# Altium PCB T3168.PcbDoc
Units mil, origin at the board's own origin, x right, y up, seen from the top; angles counter-clockwise.
Board outline 4005.03 x 3985.03 mil, 2 copper layers (Top Layer, Bottom Layer); 22 components, 15 nets, 90 pads, 0 vias.
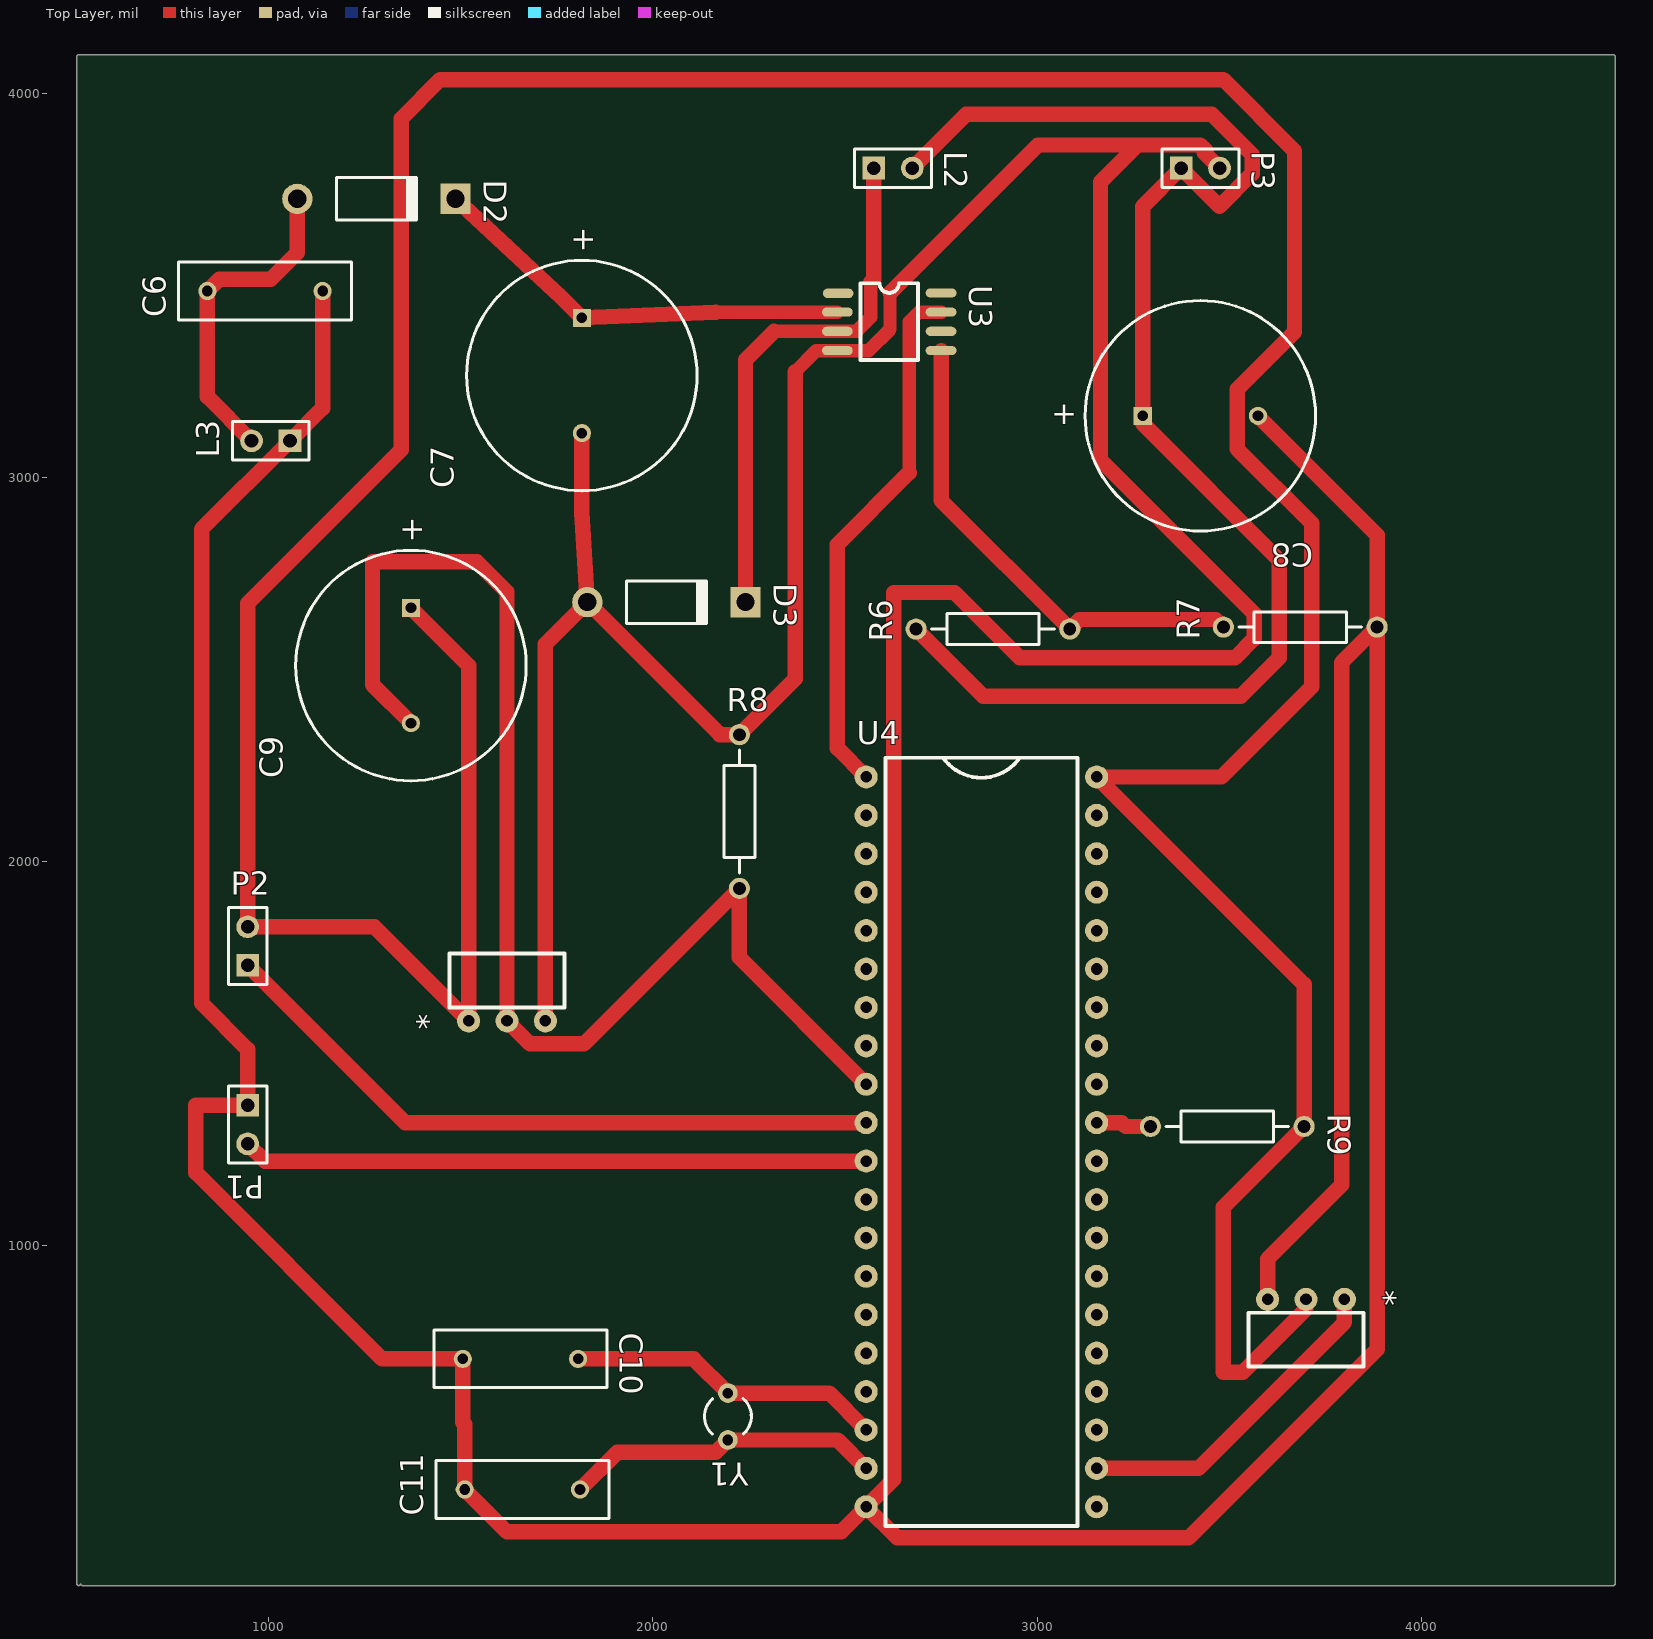
[diagram p0: Top Layer view]
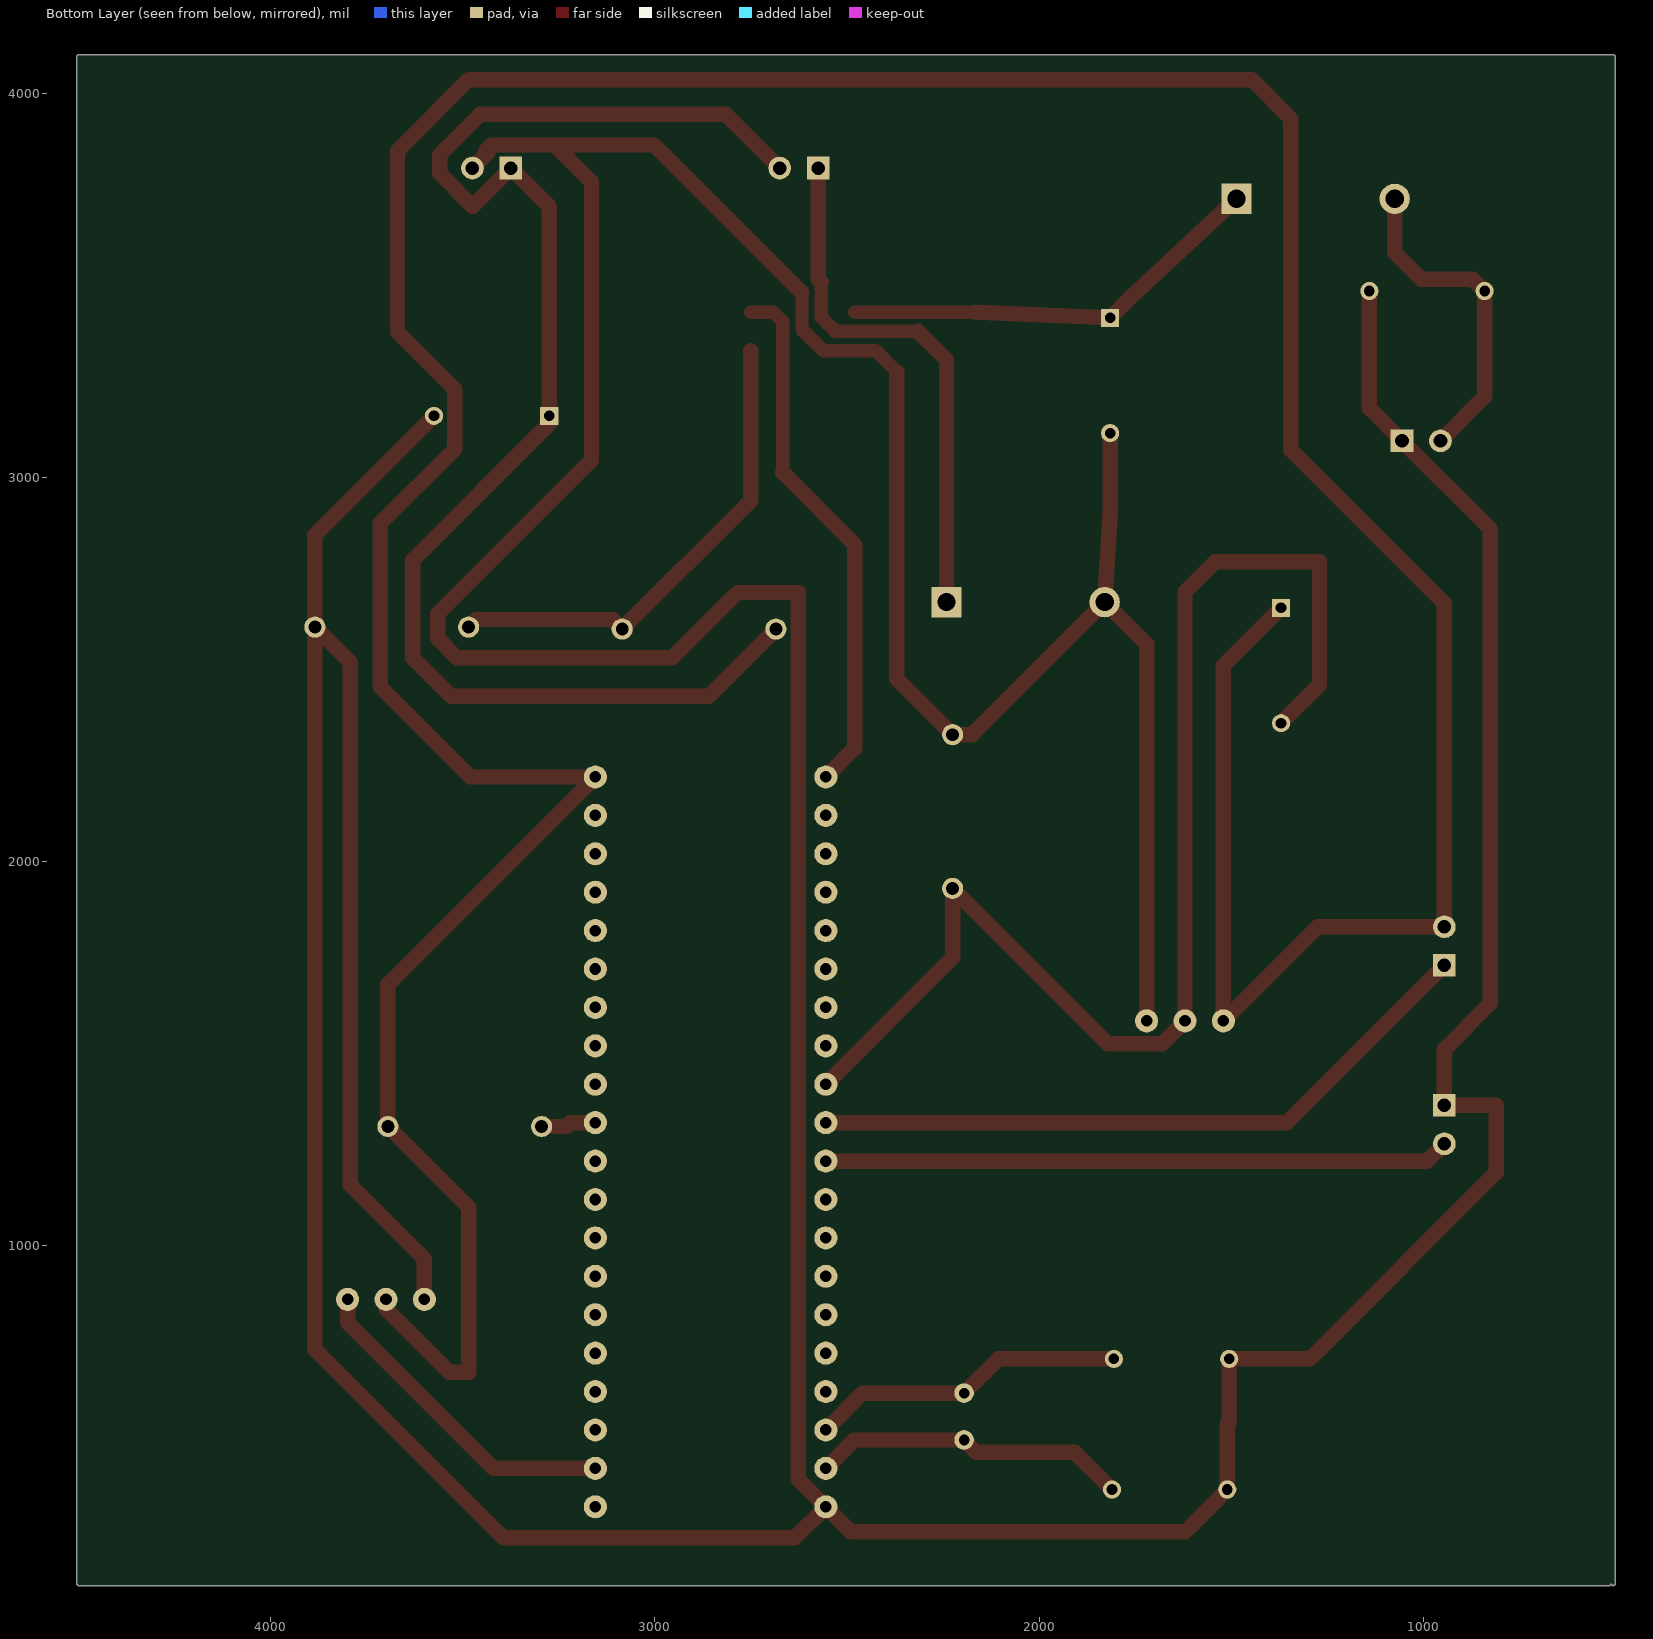
[diagram p1: Bottom Layer view, seen from below]

## Layer stack, top to bottom
Top Solder: solder mask 0.4, Solder Resist, Dk 3.5
Top Layer: signal copper 1.4
Dielectric 1: dielectric 12.6, FR-4, Dk 4.8
Bottom Layer: signal copper 1.4
Bottom Solder: solder mask 0.4, Solder Resist, Dk 3.5

## Board outline
499.98,120 499.98,4095 cw(c505,4095) 505,4100.02 4500,4100.02 cw(c4500,4095) 4505.02,4095 4505.02,120 cw(c4500,120) 4500,114.98 515,114.98 cw(c515,120) 510,119.61 cw(c505,120)

## Design rules (kind name [scope] priority, off if disabled: settings)
Clearance "Schematic Clearance Constraint_39" [HasPad('U4-1')] p1: gap=10
Clearance "Schematic Clearance Constraint_38" [HasPad('U4-2')] p2: gap=10
Clearance "Schematic Clearance Constraint_37" [HasPad('U4-3')] p3: gap=10
Clearance "Schematic Clearance Constraint_36" [HasPad('U4-4')] p4: gap=10
Clearance "Schematic Clearance Constraint_35" [HasPad('U4-5')] p5: gap=10
Clearance "Schematic Clearance Constraint_34" [HasPad('U4-6')] p6: gap=10
Clearance "Schematic Clearance Constraint_33" [HasPad('U4-7')] p7: gap=10
Clearance "Schematic Clearance Constraint_32" [HasPad('U4-8')] p8: gap=10
Clearance "Schematic Clearance Constraint_31" [HasPad('U4-9')] p9: gap=10
Clearance "Schematic Clearance Constraint_30" [HasPad('U4-10')] p10: gap=10
Clearance "Schematic Clearance Constraint_29" [HasPad('U4-11')] p11: gap=10
Clearance "Schematic Clearance Constraint_28" [HasPad('U4-12')] p12: gap=10
Clearance "Schematic Clearance Constraint_27" [HasPad('U4-13')] p13: gap=10
Clearance "Schematic Clearance Constraint_26" [HasPad('U4-14')] p14: gap=10
Clearance "Schematic Clearance Constraint_25" [HasPad('U4-15')] p15: gap=10
Clearance "Schematic Clearance Constraint_24" [HasPad('U4-16')] p16: gap=10
Clearance "Schematic Clearance Constraint_23" [HasPad('U4-17')] p17: gap=10
Clearance "Schematic Clearance Constraint_22" [HasPad('U4-18')] p18: gap=10
Clearance "Schematic Clearance Constraint_21" [HasPad('U4-19')] p19: gap=10
Clearance "Schematic Clearance Constraint_20" [HasPad('U4-20')] p20: gap=10
Clearance "Schematic Clearance Constraint_19" [HasPad('U4-21')] p21: gap=10
Clearance "Schematic Clearance Constraint_18" [HasPad('U4-22')] p22: gap=10
Clearance "Schematic Clearance Constraint_17" [HasPad('U4-23')] p23: gap=10
Clearance "Schematic Clearance Constraint_16" [HasPad('U4-24')] p24: gap=10
Clearance "Schematic Clearance Constraint_15" [HasPad('U4-25')] p25: gap=10
Clearance "Schematic Clearance Constraint_14" [HasPad('U4-26')] p26: gap=10
Clearance "Schematic Clearance Constraint_13" [HasPad('U4-27')] p27: gap=10
Clearance "Schematic Clearance Constraint_12" [HasPad('U4-28')] p28: gap=10
Clearance "Schematic Clearance Constraint_11" [HasPad('U4-29')] p29: gap=10
Clearance "Schematic Clearance Constraint_10" [HasPad('U4-30')] p30: gap=10
Clearance "Schematic Clearance Constraint_9" [HasPad('U4-31')] p31: gap=10
Clearance "Schematic Clearance Constraint_8" [HasPad('U4-32')] p32: gap=10
Clearance "Schematic Clearance Constraint_7" [HasPad('U4-33')] p33: gap=10
Clearance "Schematic Clearance Constraint_6" [HasPad('U4-34')] p34: gap=10
Clearance "Schematic Clearance Constraint_5" [HasPad('U4-35')] p35: gap=10
Clearance "Schematic Clearance Constraint_4" [HasPad('U4-36')] p36: gap=10
Clearance "Schematic Clearance Constraint_3" [HasPad('U4-37')] p37: gap=10
Clearance "Schematic Clearance Constraint_2" [HasPad('U4-38')] p38: gap=10
Clearance "Schematic Clearance Constraint_1" [HasPad('U4-39')] p39: gap=10
Clearance "Schematic Clearance Constraint" [HasPad('U4-40')] p40: gap=10
Clearance [All] p41: gap=10
PolygonConnect [All] p1: connectstyle=Relief reliefconductorwidth=10 reliefentries=4 polygonreliefangle="90 Angle" airgapwidth=10
RoutingLayers [All] p1: top layer_v5=TRUE bottom layer_v5=FALSE
RoutingVias [All] p1: holewidth=28 width=40 viastyle="Through Hole" minholewidth=10 minwidth=20 maxholewidth=50 maxwidth=70
SolderMaskExpansion [All] p1: expansion=4
Width [All] p1: maxlimit=50 minlimit=10 preferedwidth=40
29 further rules are at their usual default settings.

## Components (designator, comment, footprint, x,y, rotation, side; value= is the part's Value field where it differs from the comment)
* "SWITCH" SWITCH 1620,1685 r90 top
* "SWITCH" SWITCH 3700,760 r270 top
C6 "Cap" RAD-0.3 990,3485 r180 top
C7 "Cap Pol1" RB7.6-15 1815,3265 r90 top
C8 "Cap Pol1" RB7.6-15 3425,3160 r180 top
C9 "Cap Pol1" RB7.6-15 1370,2510 r90 top
C10 "Cap" RAD-0.3 1655,705 r0 top
C11 "Cap" RAD-0.3 1660,365 r180 top
D2 "1N5817" DO-41 1280,3725 r0 top
D3 "1N5817" DO-41 2035,2675 r0 top
L2 "10uF/CD54" HDR1X2 2575,3805 r0 top
L3 "1" HDR1X2 1055,3095 r180 top
P1 "Header 2" HDR1X2 945,1365 r270 top
P2 "Header 2" HDR1X2 945,1730 r90 top
P3 "Header 2" HDR1X2 3375,3805 r0 top
R6 "Res2" AXIAL-0.4 2885,2605 r180 top
R7 "Res2" AXIAL-0.4 3685,2610 r180 top
R8 "Res2" AXIAL-0.4 2225,2130 r90 top
R9 "Res2" AXIAL-0.4 3495,1310 r0 top
U3 "T3168" "XKT-801 - duplicate1" 2367,3459 r0 top
U4 "STC89C52RC" STC89C52RC 760,3105 r0 top
Y1 "12MHZ" R38 2195,555 r180 top

## Footprints (in the part's own frame and the unit in brackets; to place one, negate y for a bottom-side part, rotate by r counter-clockwise, add the part's x,y. Pads: shape width x height; smd on the part's side, far side on the other; paste and mask are expansions set on the pad)
AXIAL-0.4 [mm] "Axial Device, Thru-Hole; 2 Leads; 0.4 in Pin Spacing"
  round 1.4 hole 0.85: 1(-5.08,0) 2(5.08,0)
  silkscreen extent -4.06,-1.02 4.06,1.02
DO-41 [mm] "Diode, Axial; Body 5.2 x 2.7 mm (LxDia. max), Lead Dia. 0.86 mm (max)"
  round 2 hole 1.2: 1(-5.23,0)
  rect 2x2 hole 1.2: 2(5.23,0)
  silkscreen extent -2.65,-1.4 2.75,1.4
HDR1X2 [mm] "Connector; Header; 2 Position"
  rect 1.5x1.5 hole 0.9: 1(0,0)
  round 1.5 hole 0.9: 2(2.54,0)
  silkscreen extent -1.27,-1.27 3.81,1.27
R38 [mm] "Crystal, Thru-Hole; 2 Leads; Body 3.1 x 8.2 mm (Dia.xH)"
  round 1.3 hole 0.7: 1(0,1.55) 2(0,-1.55)
  silkscreen extent -1.55,-1.19 1.55,1.17
RAD-0.3 [mm] "Radial Cap, Thru-Hole; 2 Leads; 0.3 in Pin Spacing"
  round 1.2 hole 0.7: 1(-3.81,0) 2(3.81,0)
  silkscreen extent -5.71,-1.91 5.71,1.91
RB7.6-15 [mm] "Polarized Capacitor (Radial); 2 Leads"
  rect 1.2x1.2 hole 0.7: 1(3.81,0)
  round 1.2 hole 0.7: 2(-3.81,0)
  silkscreen extent -7.62,-7.62 7.62,7.62
STC89C52RC [mil]
  round 60 hole 30: 1(1795,-885) 2(1795,-985) 3(1795,-1085) 4(1795,-1185) 5(1795,-1285) 6(1795,-1385) 7(1795,-1485) 8(1795,-1585) 9(1795,-1685) 10(1795,-1785) 11(1795,-1885) 12(1795,-1985) 13(1795,-2085) 14(1795,-2185) 15(1795,-2285) 16(1795,-2385) 17(1795,-2485) 18(1795,-2585) 19(1795,-2685) 20(1795,-2785) 21(2395,-2785) 22(2395,-2685) 23(2395,-2585) 24(2395,-2485) 25(2395,-2385) 26(2395,-2285) 27(2395,-2185) 28(2395,-2085) 29(2395,-1985) 30(2395,-1885) 31(2395,-1785) 32(2395,-1685) 33(2395,-1585) 34(2395,-1485) 35(2395,-1385) 36(2395,-1285) 37(2395,-1185) 38(2395,-1085) 39(2395,-985) 40(2395,-885)
  silkscreen extent 1845,-2835 2345,-835
SWITCH [mil]
  round 60 hole 30: 1(-100,-100) 2(-100,0) 3(-100,100)
  silkscreen extent -65,-150 75,150
"XKT-801 - duplicate1" [mil]
  oval 80x24 smd: 1(115,20) 2(113,-29) 3(113,-79) 4(113,-129) 5(383,-129) 6(383,-79) 7(383,-29) 8(383,21)
  silkscreen extent 173,-154 323,46

## Part data
C6 C10 C11: "Capacitor"
C7 C8 C9: "Polarized Capacitor (Radial)"
D2 D3: library part "Diode 1N4001", "1 Amp General Purpose Rectifier"
L2 L3: library part "Header 2", "Header, 2-Pin"
P1 P2 P3: "Header, 2-Pin"
R6 R7 R8 R9: "Resistor"
Y1: library part XTAL, "Crystal Oscillator"

## Nets (pads, with @x,y where several pads share a name; then routed paths per layer and width w, separated by ;. In a path a pad name is that pad's centre, name@x,y a point inside that pad or via, vN(x,y) a via of type N, cw(c..) or ccw(c..) an arc to the next point about the centre after c; other vN are vias at no path point)
GND: *.1 C6.1 C7.2 C8.2 C10.1 C11.2 D3.1 L3.1 P1.1 P3.2 R7.1 R8.2 U3.4 U4.20 | length 20462.3
  Top Layer w35: 2370,3275 2425,3330 U3.4 2562,3330 2617,3385 2617,3480
  Top Layer w40: C6.1 1140,3180 L3.1 825,2865 825,1630.94 945,1510.94 P1.1 810,1365 810,1190 1295,705 C10.1 1505,540 1510,535 C11.2 1620,255 2490,255 U4.20 ; *.1@1720,1585 1720,2565.91 D3.1 ; C7.2 1815,2909.09 D3.1 ; 2370,3275 2370,2475 R8.2 2174.09,2330 D3.1 ; 2617,3480 3002,3865 3261,3865 ; P3.2 3441.13,3838.87 ; C8.2 3885,2850 R7.1 ; *.1@3600,860 3600,965 3793,1158 3793,2518 R7.1 ; U4.20 2627,392 2627,2700 2785,2700 2955,2530 3515,2530 3565,2580 3565,2645.56 3165,3045.56 3165,3769 3261,3865 ; U4.20 2636,239 3394,239 3885,730 R7.1 ; 3261,3865 3425,3865 3435,3855 ; 3435,3855 3441.13,3848.87 3441.13,3838.87 ; 3435,3855 3435,3845 3441.13,3838.87
Net*_2: *.2@1620,1585 C9.2 R8.1 U4.9 | length 3405
  Top Layer w40: C9.2 1270,2460 1270,2780 1542,2780 1620,2702 1620,1585 1680,1525 1820,1525 R8.1 2225,1750 U4.9
Net*_3: *.3@3800,860 U4.22 | length 862.4
  Top Layer w40: U4.22 3420,420 3800,800 *.3@3800,860
NetC6_2: C6.2 D2.1 L3.2 | length 853.1
  Top Layer w40: L3.2 840,3210 C6.2 871,3516 1005.09,3516 1074.09,3585 D2.1
NetC7_1: C7.1 D2.2 U3.2 | length 1117.5
  Top Layer w35: 2163,3430 U3.2
  Top Layer w40: D2.2 1762,3468 C7.1 2163,3430
NetC8_1: C8.1 L2.2 P3.1 R6.2 | length 3820
  Top Layer w40: L2.2 2815,3945 3455,3945 3560,3840 3560,3790.47 3474.76,3705.24 P3.1 3275,3705 C8.1 3275,3140 3630,2785 3630,2530 3530,2430 2860,2430 R6.2
NetC10_2: C10.2 U4.18 Y1.2 | length 826.6
  Top Layer w40: C10.2 2106.02,705 Y1.2 2458.98,616.02 U4.18
NetC11_1: C11.1 U4.19 Y1.1 | length 829.1
  Top Layer w40: C11.1 1907,462 2163.02,462 Y1.1 2481.02,493.98 U4.19
NetD3_2: D3.2 L2.1 U3.3 | length 1394.3
  Top Layer w35: 2315,3380 U3.3 2530,3380 2567,3417 2567,3508
  Top Layer w40: D3.2 2240.91,3305.91 2315,3380 ; 2567,3508 2575,3516 L2.1
NetP1_2: P1.2 U4.11 | length 1628.6
  Top Layer w40: P1.2 990,1220 U4.11
NetP2_1: P2.1 U4.10 | length 1779.8
  Top Layer w40: P2.1 1355,1320 U4.10
NetR6_1: R6.1 R7.2 U3.5 | length 1282.4
  Top Layer w40: U3.5 2750,2940 R6.1 3110,2630 3465,2630 R7.2
NetR9_1: R9.1 U4.31 | length 144.1
  Top Layer w40: U4.31 3220,1320 3230,1310 R9.1
NetU3_7: U3.7 U4.1 | length 1386.9
  Top Layer w35: 2667,3012 2667,3405 2692,3430 U3.7
  Top Layer w40: U4.1 2480,2295 2480,2825 2667,3012
VCC: *.2@3700,860 *.3@1520,1585 C9.1 P2.2 R9.2 U4.40 | length 10890.2
  Top Layer w40: C9.1 1520,2510 1520,1585 1275,1830 P2.2 945,2672 1345,3072 1345,3934 1446,4035 3485,4035 3670,3850 3670,3378 3521,3229 3521,3074 3715,2880 3715,2455 3480,2220 U4.40 3695,1680 R9.2 3485,1100 3485,670 3535,670 3700,835 *.2@3700,860
pads on no net: U3.1 U3.6 U3.8 U4.2 U4.3 U4.4 U4.5 U4.6 U4.7 U4.8 U4.12 U4.13 U4.14 U4.15 U4.16 U4.17 U4.21 U4.23 U4.24 U4.25 U4.26 U4.27 U4.28 U4.29 U4.30 U4.32 U4.33 U4.34 U4.35 U4.36 U4.37 U4.38 U4.39

## Text inside footprints (layer, text, board x,y; h text height)
C7: Top Overlay "+" at 1844.01,3585.15 h59.06 r90
C8: Top Overlay "+" at 3104.85,3189.01 h59.06 r180
C9: Top Overlay "+" at 1399.01,2830.15 h59.06 r90